# Altium PCB stm32.PcbDoc
Units mil, origin at the board's own origin, x right, y up, seen from the top; angles counter-clockwise.
Board outline 2100 x 900 mil, 2 copper layers (Top Layer, Bottom Layer); 37 components, 52 nets, 187 pads, 0 vias.
Unrouted connection lines stored in the file: 127.
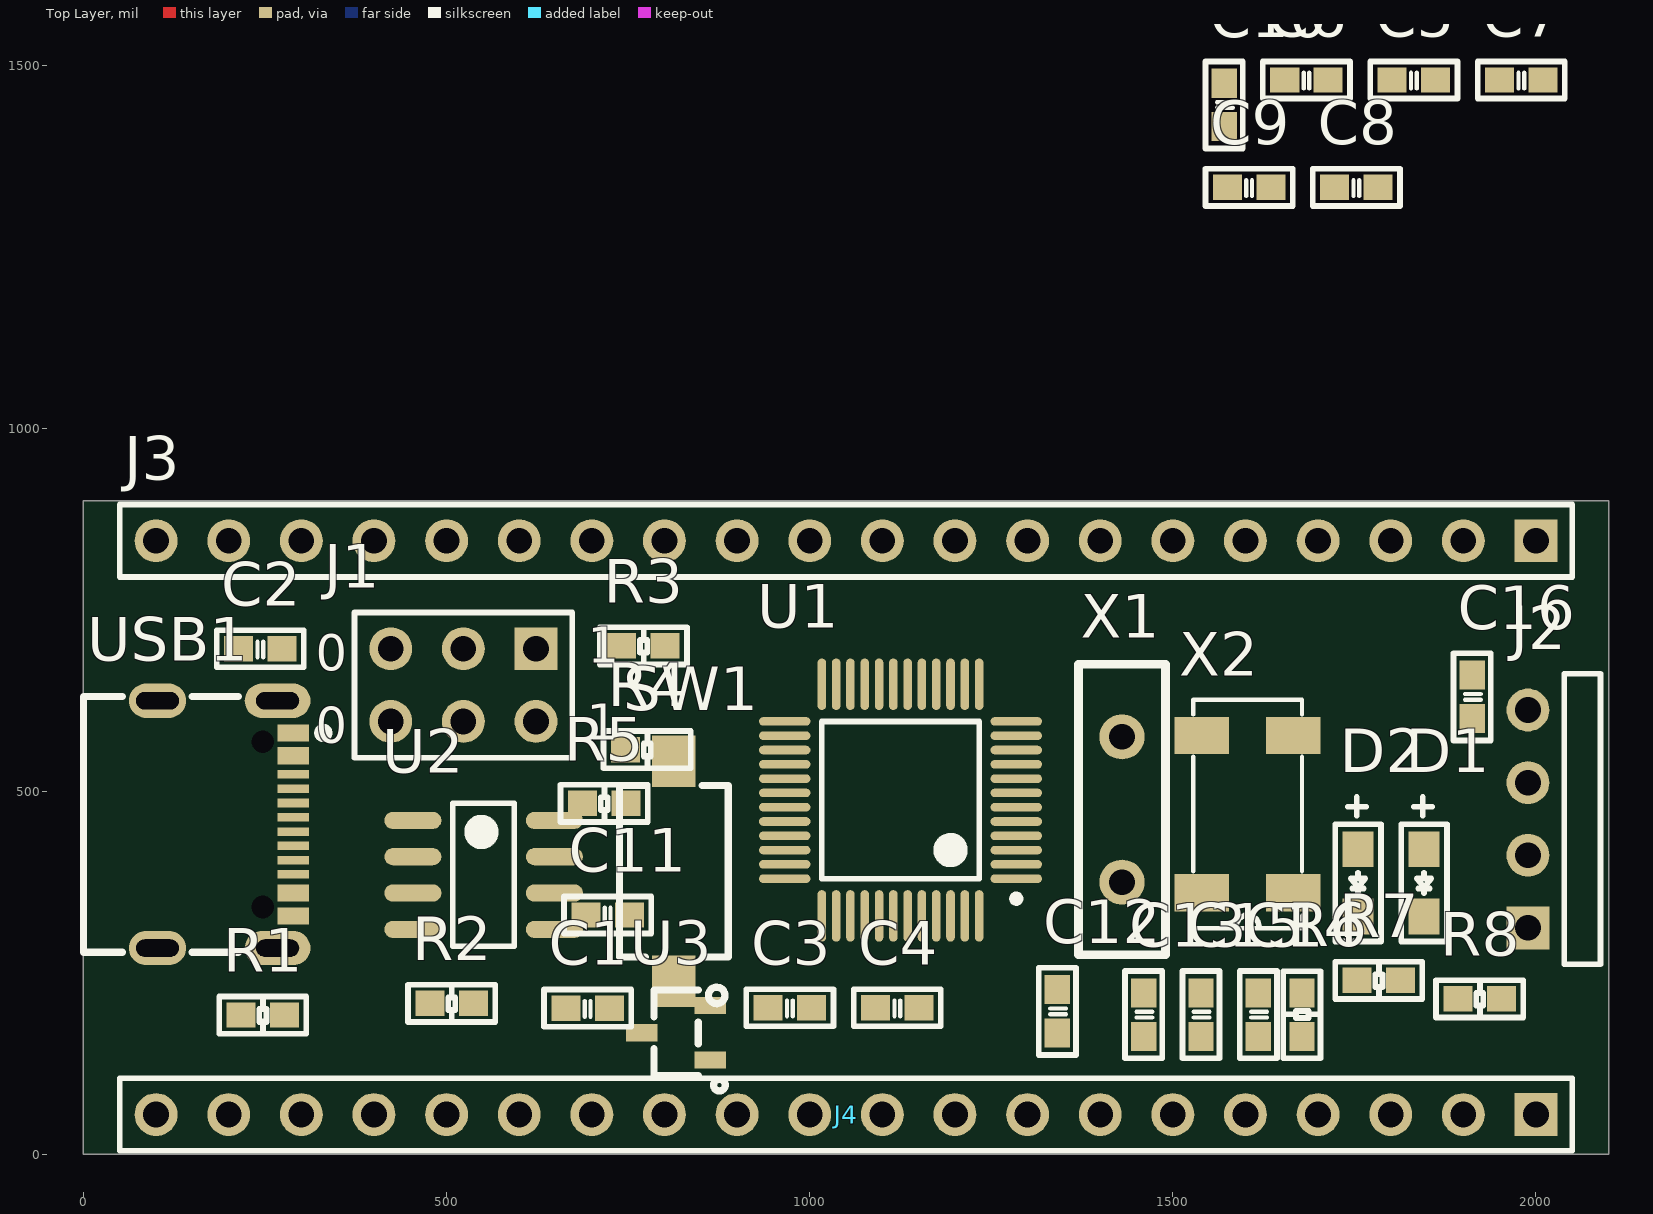
[diagram p0: Top Layer view]
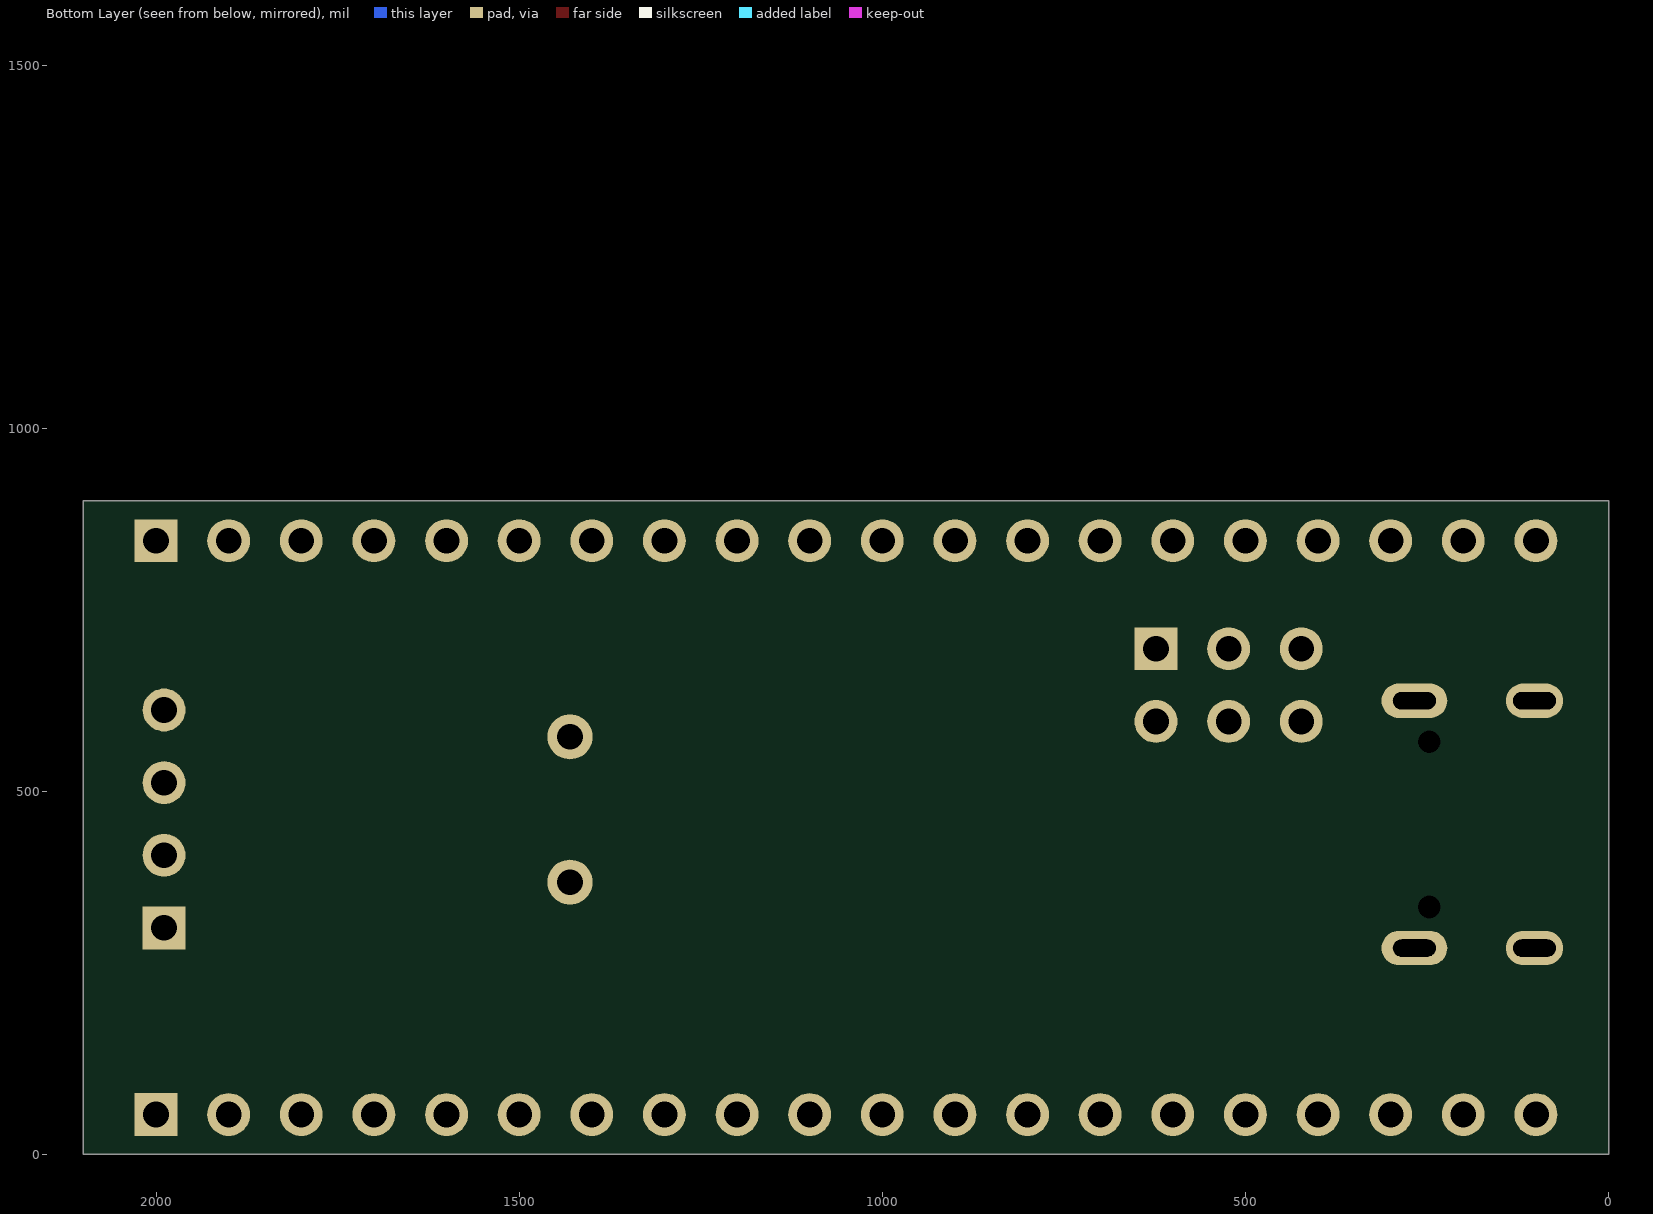
[diagram p1: Bottom Layer view, seen from below]

## Layer stack, top to bottom
Top Solder: solder mask 0.4, Solder Resist, Dk 3.5
Top Layer: signal copper 1.4
Dielectric 1: dielectric 12.6, FR-4, Dk 4.8
Bottom Layer: signal copper 1.4
Bottom Solder: solder mask 0.4, Solder Resist, Dk 3.5

## Board outline
0,0 2100,0 2100,900 0,900

## Design rules (kind name [scope] priority, off if disabled: settings)
Clearance [All] p1: gap=10 ignorepadtopadclearanceinfootprint=FALSE except(0: Arc-Hole Track-Hole SMDPad-Hole THPad-Hole Via-Hole Fill-Hole Poly-Hole Region-Hole Text-Hole)
PolygonConnect [All] p1: connectstyle=Relief reliefconductorwidth=10 reliefentries=4 polygonreliefangle="90 Angle" airgapwidth=10
RoutingVias [All] p1: holewidth=28 width=50 viastyle="Through Hole" minholewidth=28 minwidth=50 maxholewidth=28 maxwidth=50
SolderMaskExpansion [All] p1: expansion=4 istentingtop=FALSE
Width [All] p1: maxlimit=10 minlimit=10 preferedwidth=10
30 further rules are at their usual default settings.

## Components (designator, comment, footprint, x,y, rotation, side; value= is the part's Value field where it differs from the comment)
C1 "100nF" C0603 694.27,201.45 r0 top value=104
C2 "100nF" C0603 243.53,696.27 r0 top value=104
C3 "1uF" C0603 972.73,202.03 r0 top value=104
C4 "1uF" C0603 1120.61,202.03 r0 top value=104
C5 "100nF" C0603 1831.87,1479.47 r0 top value=104
C6 "100nF" C0603 1683.99,1479.47 r0 top value=104
C7 "100nF" C0603 1979.74,1479.47 r0 top value=104
C8 "100nF" C0603 1752.81,1331.6 r0 top value=104
C9 "100nF" C0603 1604.94,1331.6 r0 top value=104
C10 "4.7uF" C0603 1570.53,1445.06 r90 top value=104
C11 "100nF" C0603 721.66,329.73 r0 top value=104
C12 "20pF" C0603 1341,197 r90 top value=104
C13 "20pF" C0603 1459.73,192.62 r90 top value=104
C14 "20pF" C0603 1617.84,192.62 r90 top value=104
C15 "20pF" C0603 1538.79,192.62 r90 top value=104
C16 "105" C0603 1912,630 r90 top value=104
D1 "LED" LED 1845.9,373.95 r90 top
D2 "LED" LED 1755.03,373.95 r90 top
J1 "Header 3X2" HDR2X3 623.12,696.27 r180 top
J2 "SWD" HDR1X4H 1989,312 r90 top
J3 "Header 20" HDR1X20 2000,845 r180 top
J4 "Header 20" HDR1X20 2000,55 r180 top
R1 "5.1K" R0603 246.92,192 r0 top
R2 "5.1K" R0603 506.92,208 r0 top
R3 "10K,0603" R0603 771.04,700.27 r0 top
R4 "10K,0603" R0603 776.16,557.48 r0 top
R5 "10K,0603" R0603 716.94,483.43 r0 top
R6 "1M" R0603 1677.8,192.54 r90 top
R7 "510R" R0603 1783.61,239.78 r0 top
R8 "510R" R0603 1922.42,214.19 r0 top
SW1 "SW-PB_V" KET-SMT-2 813,390 r90 top
U1 "STM32F103C8T6" 48P 1125,488 r180 top
U2 "CH340N" SOP_8(OPA) 551,385 r0 top
U3 "ME6206A33XG" SOT-23-3 768.65,167.51 r0 top
USB1 "TYPR-C 16PIN 2MD(073)" Type-C_USB 267.35,624.75 r270 top
X1 "8MHz" XTAL1 1430,375 r90 top
X2 "32.768kHz" MC-306 1602.99,468.73 r90 top

## Footprints (in the part's own frame and the unit in brackets; to place one, negate y for a bottom-side part, rotate by r counter-clockwise, add the part's x,y. Pads: shape width x height; smd on the part's side, far side on the other; paste and mask are expansions set on the pad)
48P [mm]
  oval 1.8x0.3 smd: 1(-4.05,2.75) 2(-4.05,2.25) 3(-4.05,1.75) 4(-4.05,1.25) 5(-4.05,0.75) 6(-4.05,0.25) 7(-4.05,-0.25) 8(-4.05,-0.75) 9(-4.05,-1.25) 10(-4.05,-1.75) 11(-4.05,-2.25) 12(-4.05,-2.75) 25(4.05,-2.75) 26(4.05,-2.25) 27(4.05,-1.75) 28(4.05,-1.25) 29(4.05,-0.75) 30(4.05,-0.25) 31(4.05,0.25) 32(4.05,0.75) 33(4.05,1.25) 34(4.05,1.75) 35(4.05,2.25) 36(4.05,2.75)
  oval 0.3x1.8 smd: 13(-2.75,-4.05) 14(-2.25,-4.05) 15(-1.75,-4.05) 16(-1.25,-4.05) 17(-0.75,-4.05) 18(-0.25,-4.05) 19(0.25,-4.05) 20(0.75,-4.05) 21(1.25,-4.05) 22(1.75,-4.05) 23(2.25,-4.05) 24(2.75,-4.05) 37(2.75,4.05) 38(2.25,4.05) 39(1.75,4.05) 40(1.25,4.05) 41(0.75,4.05) 42(0.25,4.05) 43(-0.25,4.05) 44(-0.75,4.05) 45(-1.25,4.05) 46(-1.75,4.05) 47(-2.25,4.05) 48(-2.75,4.05)
  silkscreen extent -4.18,-2.75 2.75,3.57, body extent -3.5,-3.5 3.5,3.5, height 1.6
C0603 [mil]
  rect 40x35 smd: 1(-29.92,0) 2(29.92,0)
  silkscreen extent -60,-26 60,26
HDR1X4H [mm] "Connector; Header; 4 Position; Right Angle"
  rect 1.5x1.5 hole 0.9: 1(0,0)
  round 1.5 hole 0.9: 2(2.54,0) 3(5.08,0) 4(7.62,0)
  silkscreen extent -1.27,-2.54 8.89,-1.27
HDR1X20 [mm] "Connector; Header; 20 Position"
  rect 1.5x1.5 hole 0.9: 1(0,0)
  round 1.5 hole 0.9: 2(2.54,0) 3(5.08,0) 4(7.62,0) 5(10.16,0) 6(12.7,0) 7(15.24,0) 8(17.78,0) 9(20.32,0) 10(22.86,0) 11(25.4,0) 12(27.94,0) 13(30.48,0) 14(33.02,0) 15(35.56,0) 16(38.1,0) 17(40.64,0) 18(43.18,0) 19(45.72,0) 20(48.26,0)
  silkscreen extent -1.27,-1.27 49.53,1.27
HDR2X3 [mm] "Connector; Header; 3x2 Position"
  rect 1.5x1.5 hole 0.9: 1(0,0)
  round 1.5 hole 0.9: 2(0,2.54) 3(2.54,0) 4(2.54,2.54) 5(5.08,0) 6(5.08,2.54)
  silkscreen extent -1.27,-1.27 6.35,3.81
KET-SMT-2 [mm]
  rect 1.8x1.524 smd: 1(-3.85,0) 2(3.85,0)
  silkscreen extent -4.63,-1.91 3,1.91
LED [mil]
  rect 49x43 smd: 1(46.26,0) 2(-46.26,0)
  silkscreen extent -81,-31 118,31
MC-306 [mm]
  rect 1.3x1.9 smd: 1(-2.75,-1.6) 2(2.75,-1.6) 3(2.75,1.6) 4(-2.75,1.6)
  silkscreen extent -4,-1.9 4,1.9
R0603 [mil]
  rect 40x35 smd: 1(-29.92,0) 2(29.92,0)
  silkscreen extent -60,-26 60,26
SOP_8(OPA) [mm] "SOIC, 8-Leads, Body 5.0x4.0mm (max), Pitch 1.27mm, IPC Medium Density"
  oval 2x0.6 smd: 1(-2.475,1.905) 2(-2.475,0.635) 3(-2.475,-0.635) 4(-2.475,-1.905) 5(2.475,-1.905) 6(2.475,-0.635) 7(2.475,0.635) 8(2.475,1.905)
  silkscreen extent -1.07,-2.5 1.08,2.5, body extent -2,-2.5 2,2.5, height 1.75
SOT-23-3 [mm]
  rect 1.1x0.6 smd: 1(2.4,-0.95) 2(2.4,0.95) 3(0,0)
  silkscreen extent 0.43,-2.03 2.92,1.5, body extent 0.43,-1.5 1.98,1.52, height 0.25
Type-C_USB [mm]
  rect 0.6x1.1 smd mask+0.05: 1(1.125,0.55) 2(1.925,0.55) 11(6.725,0.55) 12(7.525,0.55)
  rect 0.3x1.1 smd mask+0.05: 3(2.575,0.55) 4(3.075,0.55) 5(3.575,0.55) 6(4.075,0.55) 7(4.575,0.55) 8(5.075,0.55) 9(5.575,0.55) 10(6.075,0.55)
  oval 1.2x2.3 hole 0.6 slot 1.5 at 90 deg mask+0.05: 13(8.65,0) 16(0,0)
  oval 1.2x2 hole 0.6 slot 1.5 at 90 deg mask+0.05: 14(8.65,-4.2) 15(0,-4.2)
  round 0 hole 0.8 unplated mask+0.102: MH1(1.435,-0.52) MH1(7.215,-0.52)
  silkscreen extent -0.15,-6.79 8.8,1.79, body extent -0.2,-6.78 8.81,0.81, height 0.25
XTAL1 [mil]
  round 62 hole 35.43: 1(0,0) 2(200,0)
  silkscreen extent -100,-60 300,60

## Part data
C1 C2 C3 C4 C5 C6 C7 C8 C9 C10 C11 C12 C13 C14 C15 C16: library part Cap_1, "Capacitor", LatestRevisionDate=17-Jul-2002, LatestRevisionNote="Re-released for DXP Platform.", Published=8-Jun-2000, Publisher="Altium Limited"
D1 D2: library part LED_1
J1: library part "Header 3X2_1", "Header, 3-Pin, Dual row", LatestRevisionDate=17-Jul-2002, LatestRevisionNote="Re-released for DXP Platform.", Publisher="Altium Limited"
J2: library part "Header 4_1", "Header, 4-Pin", LatestRevisionDate=17-Jul-2002, LatestRevisionNote="Re-released for DXP Platform.", Publisher="Altium Limited"
J3 J4: library part "Header 20_1", "Header, 20-Pin", LatestRevisionDate=17-Jul-2002, LatestRevisionNote="Re-released for DXP Platform.", Publisher="Altium Limited"
R1 R2 R3 R4 R5 R6: library part Res_1, "Resistor", LatestRevisionDate=17-Jul-2002, LatestRevisionNote="Re-released for DXP Platform.", Published=8-Jun-2000, Publisher="Altium Limited"
R7 R8: library part Res_1, "Resistor  510Ω", LatestRevisionDate=17-Jul-2002, LatestRevisionNote="Re-released for DXP Platform.", Published=8-Jun-2000, Publisher="Altium Limited"
SW1: "SWITCH"
U2: "USB转串口芯片"
U3: "3.3稳压"
USB1: library part USB, "TYPE-C-16PIN"
X1: library part XTAL_1, "Crystal Oscillator", LatestRevisionDate=17-Jul-2002, LatestRevisionNote="Re-released for DXP Platform.", Published=8-Jun-2000, Publisher="Altium Limited"
X2: library part XTAL_2, "晶振 32.768kHz"

## Nets (pads, with @x,y where several pads share a name; then routed paths per layer and width w, separated by ;. In a path a pad name is that pad's centre, name@x,y a point inside that pad or via, vN(x,y) a via of type N, cw(c..) or ccw(c..) an arc to the next point about the centre after c; other vN are vias at no path point)
BOOT0: R3.1 U1.44
BOOT1: R4.2 U1.20
GND: C1.1 C2.1 C3.1 C4.1 C5.2 C6.2 C7.2 C8.2 C9.2 C10.2 C11.1 C12.1 C13.1 C14.1 C15.1 C16.1 J1.5 J1.6 J2.4 J3.19 J3.20 J4.2 R1.1 R2.1 R7.2 SW1.1 U1.8 U1.23 U1.35 U1.47 U2.3 U3.1 USB1.1 USB1.12 USB1.13 USB1.14 USB1.15 USB1.16
NetC1_2: C1.2 U2.8
NetD1_K: D1.2 R7.1
NetD2_K: D2.2 R8.1
NetJ1_3: J1.3 R3.2
NetJ1_4: J1.4 R4.1
NetR1_2: R1.2 USB1.4
NetR2_2: R2.2 USB1.10
OSCIN: C14.2 R6.2 U1.5
OSCOUT: C15.2 R6.1 U1.6 X1.1
PA0: J3.5 U1.10
PA1: J3.6 U1.11
PA2: J3.7 U1.12
PA3: J3.8 U1.13
PA4: J3.9 U1.14
PA5: J3.10 U1.15
PA6: J3.11 U1.16
PA7: J3.12 U1.17
PA8: J4.16 U1.29
PA9: J4.15 U1.30 U2.7
PA10: J4.14 U1.31 U2.6
PA11: J4.13 U1.32
PA12: J4.12 U1.33
PA15: J4.11 U1.38
PB0: J3.13 U1.18
PB1: J3.14 U1.19
PB3: J4.10 U1.39
PB4: J4.9 U1.40
PB5: J4.8 U1.41
PB6: J4.7 U1.42
PB7: J4.6 U1.43
PB8: J4.5 U1.45
PB9: J4.4 U1.46
PB10: J3.15 U1.21
PB11: J3.16 U1.22
PB12: J4.20 U1.25
PB13: J4.19 U1.26
PB14: J4.18 U1.27
PB15: J4.17 U1.28
PC13: J3.2 R8.2 U1.2
PC14: C12.2 J3.3 U1.3 X2.4
PC15: C13.2 J3.4 U1.4 X2.1
RESET: C11.2 J3.17 R5.1 SW1.2 U1.7
SWCLK: J2.3 U1.37
SWDIO: J2.2 U1.34
UD+: U2.1 USB1.6 USB1.8
UD-: U2.2 USB1.5 USB1.7
VBAT: J3.1 U1.1
VCC3V3: C4.2 C5.1 C6.1 C7.1 C8.1 C9.1 C10.1 C16.2 D1.1 D2.1 J1.1 J1.2 J2.1 J3.18 J4.1 R5.2 U1.9 U1.24 U1.36 U1.48 U3.2
VCC5: C2.2 C3.2 J4.3 U2.5 U3.3 USB1.2 USB1.11
pads on no net: U2.4 USB1.3 USB1.9 USB1.MH1 X1.2 X2.2 X2.3

## Silkscreen, mask and mechanical layers (free items; w line width, h text height)
Mechanical 1:
  the board outline again, w10

## Dimensions
2100,900 to 2100,0 on Top Overlay
0,0 to 2100,0 on Top Overlay

## Text inside footprints (layer, text, board x,y; h text height)
J1: Top Overlay "0" at 363.12,616.27 h50 r180; Top Overlay "0" at 363.12,716.27 h50 r180; Top Overlay "1" at 693.12,571.27 h50; Top Overlay "1" at 694.27,677.14 h50